# Altium PCB PCB1.PcbDoc (part 3 of 3)
Units mm, origin at the board's own origin, x right, y up, seen from the top; angles counter-clockwise.
Board outline 127.59 x 140.12 mm, 2 copper layers (Top Layer, Bottom Layer), stack 1.57 mm thick; 24 components, 13 nets, 167 pads, 3663 vias.
Unrouted connection lines stored in the file: 2.
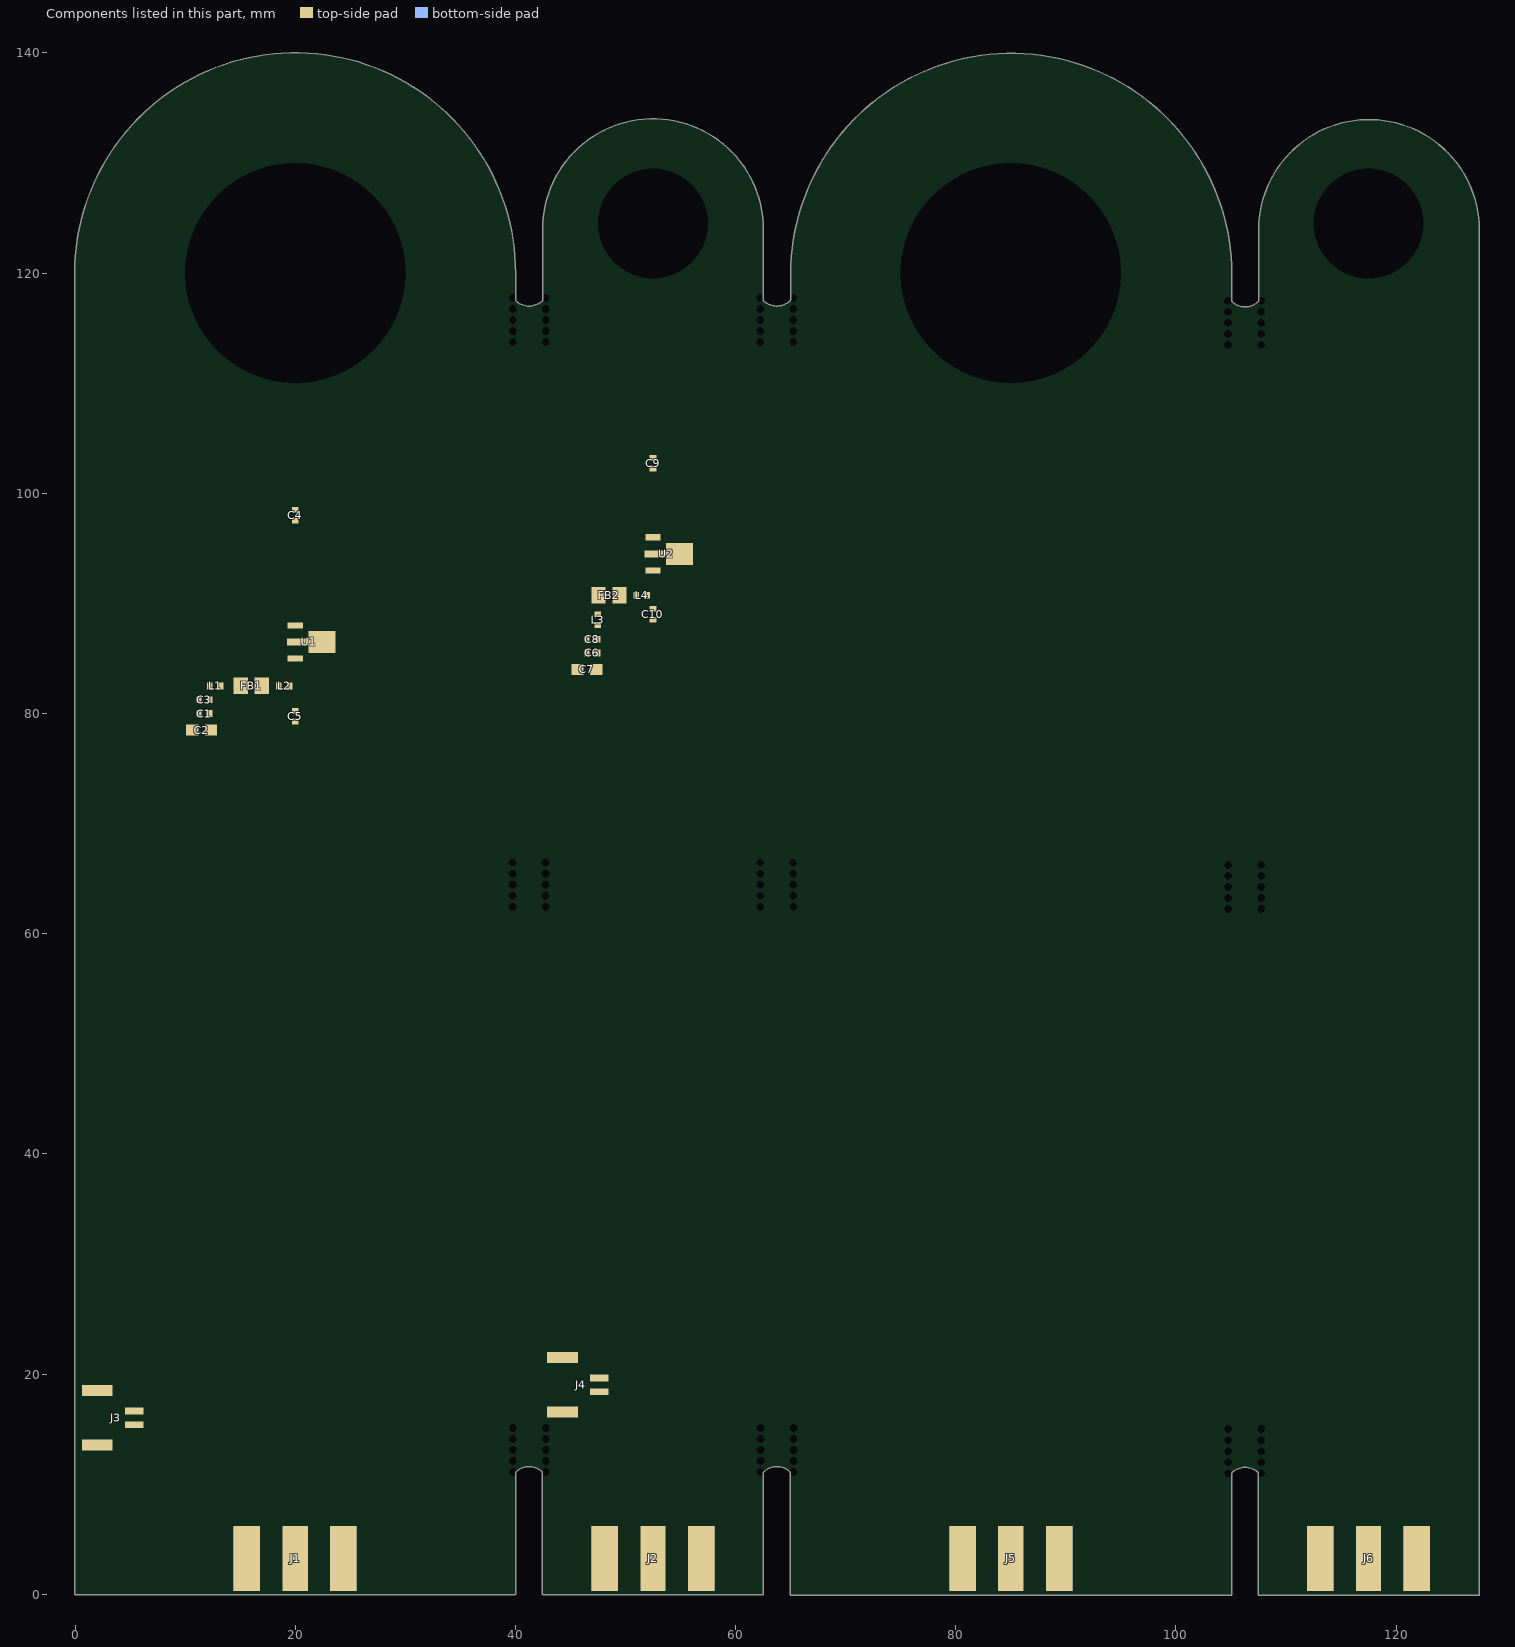
[diagram p3: the components of this part, seen from the top]

## Silkscreen, mask and mechanical layers (free items; w line width, h text height) (continued)
Outline:
  circle w0.05: c117.5,124.5 r5
  circle w0.05: c85.04,119.931 r10
  circle w0.05: c52.5,124.5 r5
  circle w0.05: c20,120 r10
  lines w0.05: 39.982,14.846 39.982,62.445 cw(c41.232,61.195) 42.482,62.445 42.482,14.827 ; 40,14.846 ccw(c41.25,16.096) 42.481,14.827 ; 42.482,66.195 cw(c41.232,67.445) 39.982,66.195 40,113.75 cw(c41.25,112.5) 42.5,113.75 42.5,66.195 ; 62.499,0 62.499,11.096 cw(c63.749,9.846) 64.999,11.097 ; 62.5,11.096 62.5,0 42.482,0 42.482,11.113 ccw(c41.25,9.846) 40,11.096 40,0 0,0 0,120 cw(c20,120) 40,120 40,117.5 ccw(c41.25,118.75) 42.5,117.5 42.5,124 cw(c52.5,124) 62.5,124 62.499,117.5 ccw(c63.749,118.75) 65.038,117.54 65.04,119.931 cw(c85.04,119.931) 105.04,119.931 105.04,117.431 ccw(c106.29,118.681) 107.54,117.431 107.54,123.931 cw(c117.54,123.931) 127.54,123.931 127.54,-0.069 107.522,-0.069 107.522,11.044 ccw(c106.29,9.777) 105.04,11.027 105.04,-0.069 65,-0.069 65,11.1 ; 64.998,113.751 ccw(c63.749,112.5) 62.499,113.75 62.481,66.196 ccw(c63.731,67.446) 65,66.215 ; 65,66.3 65,113.749 ; 105.022,14.777 105.022,62.377 cw(c106.272,61.127) 107.522,62.377 107.522,14.758 ; 105.04,14.777 ccw(c106.29,16.027) 107.522,14.758 ; 107.522,66.127 cw(c106.272,67.377) 105.022,66.127 105.04,113.681 cw(c106.29,112.431) 107.54,113.681 107.54,66.127 ; 127.54,-0.068 127.54,11.027 ; 62.481,62.446 cw(c63.731,61.196) 64.999,62.428 65.039,14.887 cw(c63.749,16.096) 62.499,14.846 62.481,62.446
Top Assembly:
  lines w0.05: 0,0 40,0 40,120 ccw(c20,120) 0,120 0,0 ; 42.482,0 42.5,124 cw(c52.5,124) 62.5,124 62.5,0 42.482,0
Drill Drawing:
  circle w0.254: c131.897,101.911 r0.847
  lines w0.254: 131.05,89.634 132.743,89.634 132.743,91.327 131.05,91.327 131.05,89.634 ; 131.05,95.137 132.743,95.137 131.897,93.444 131.05,95.137 ; 131.05,97.677 131.473,97.677 131.897,97.254 132.32,97.677 132.743,97.677 132.32,98.101 132.743,98.524 132.32,98.524 131.897,98.947 131.473,98.524 131.05,98.524 131.473,98.101 131.05,97.677 ; 131.05,105.297 131.473,105.297 131.473,104.874 132.32,104.874 132.32,105.297 132.743,105.297 132.743,106.144 132.32,106.144 132.32,106.567 131.473,106.567 131.473,106.144 131.05,106.144 131.05,105.297
  lines w0.381: 129.531,88.491 261.981,88.491 ; 129.531,107.541 261.981,107.541 ; 143.523,84.681 143.523,111.351 ; 160.283,84.681 160.283,111.351 ; 191.262,84.681 191.262,111.351 ; 204.111,84.681 204.111,111.351 ; 222.75,84.681 222.75,111.351 ; 129.531,84.681 261.981,84.681 261.981,111.351 129.531,111.351 129.531,84.681
  text "Symbol" at 131.817,108.684 h1.83
  text "Count" at 144.666,108.684 h1.83
  text "Hole Size" at 161.426,108.684 h1.83
  text "Plated" at 192.405,108.684 h1.83
  text "Hole Type" at 205.254,108.684 h1.83
  text "Drill Layer Pair" at 223.893,108.684 h1.83
  text "3659" at 144.666,104.874 h1.52
  text "0.400mm (15.75mil)" at 161.426,104.874 h1.52
  text "PTH" at 192.405,104.874 h1.52
  text "Round" at 205.254,104.874 h1.52
  text "Top Layer - Bottom Layer" at 223.893,104.874 h1.52
  text "95" at 144.666,101.064 h1.52
  text "0.700mm (27.56mil)" at 161.426,101.064 h1.52
  text "NPTH" at 192.405,101.064 h1.52
  text "Round" at 205.254,101.064 h1.52
  text "Top Layer - Bottom Layer" at 223.893,101.064 h1.52
  text "4" at 144.666,97.254 h1.52
  text "1.500mm (59.06mil)" at 161.426,97.254 h1.52
  text "PTH" at 192.405,97.254 h1.52
  text "Round" at 205.254,97.254 h1.52
  text "Top Layer - Bottom Layer" at 223.893,97.254 h1.52
  text "2" at 144.666,93.444 h1.52
  text "10.000mm (393.70mil)" at 161.426,93.444 h1.52
  text "PTH" at 192.405,93.444 h1.52
  text "Round" at 205.254,93.444 h1.52
  text "Top Layer - Bottom Layer" at 223.893,93.444 h1.52
  text "2" at 144.666,89.634 h1.52
  text "20.000mm (787.40mil)" at 161.426,89.634 h1.52
  text "PTH" at 192.405,89.634 h1.52
  text "Round" at 205.254,89.634 h1.52
  text "Top Layer - Bottom Layer" at 223.893,89.634 h1.52
  text "3762 Total" at 144.666,85.824 h1.52
Assembly Notes:
  drawing of 191 lines, arcs and shapes, not listed
  text "Layer" at 141.913,136.858 h1.52
  text "Name" at 152.324,136.858 h1.52
  text "Material" at 175.94,136.858 h1.52
  text "Thickness" at 197.778,136.858 h1.52
  text "Constant" at 214.284,136.858 h1.52
  text "Board Layer Stack" at 228.758,136.858 h1.52
  text "Top Overlay" at 152.324,133.81 h1.52
  text "Top Solder" at 152.324,130.762 h1.52
  text "Solder Resist" at 175.94,130.762 h1.52
  text "0.010mm" at 197.778,130.762 h1.52
  text "3.5" at 214.284,130.762 h1.52
  text "1" at 141.913,127.714 h1.52
  text "Top Layer" at 152.324,127.714 h1.52
  text "Copper" at 175.94,127.714 h1.52
  text "0.035mm" at 197.778,127.714 h1.52
  text "Dielectric2" at 152.324,124.666 h1.52
  text "Core-009" at 175.94,124.666 h1.52
  text "1.500mm" at 197.778,124.666 h1.52
  text "4.5" at 214.284,124.666 h1.52
  text "2" at 141.913,121.618 h1.52
  text "Bottom Layer" at 152.324,121.618 h1.52
  text "Copper" at 175.94,121.618 h1.52
  text "0.035mm" at 197.778,121.618 h1.52
  text "Bottom Solder" at 152.324,118.57 h1.52
  text "Solder Resist" at 175.94,118.57 h1.52
  text "0.010mm" at 197.778,118.57 h1.52
  text "3.5" at 214.284,118.57 h1.52
  text "Bottom Overlay" at 152.324,115.522 h1.52
  text "Total board thickness:" at 141.913,112.474 h1.52
  text "1.590mm" at 197.778,112.474 h1.52